# Altium PCB PCB-BATTERY-V1.0.PcbDoc
Units mm, origin at the board's own origin, x right, y up, seen from the top; angles counter-clockwise.
Board outline 75 x 30 mm, 2 copper layers (Top Layer, Bottom Layer); 20 components, 11 nets, 57 pads, 8 vias.
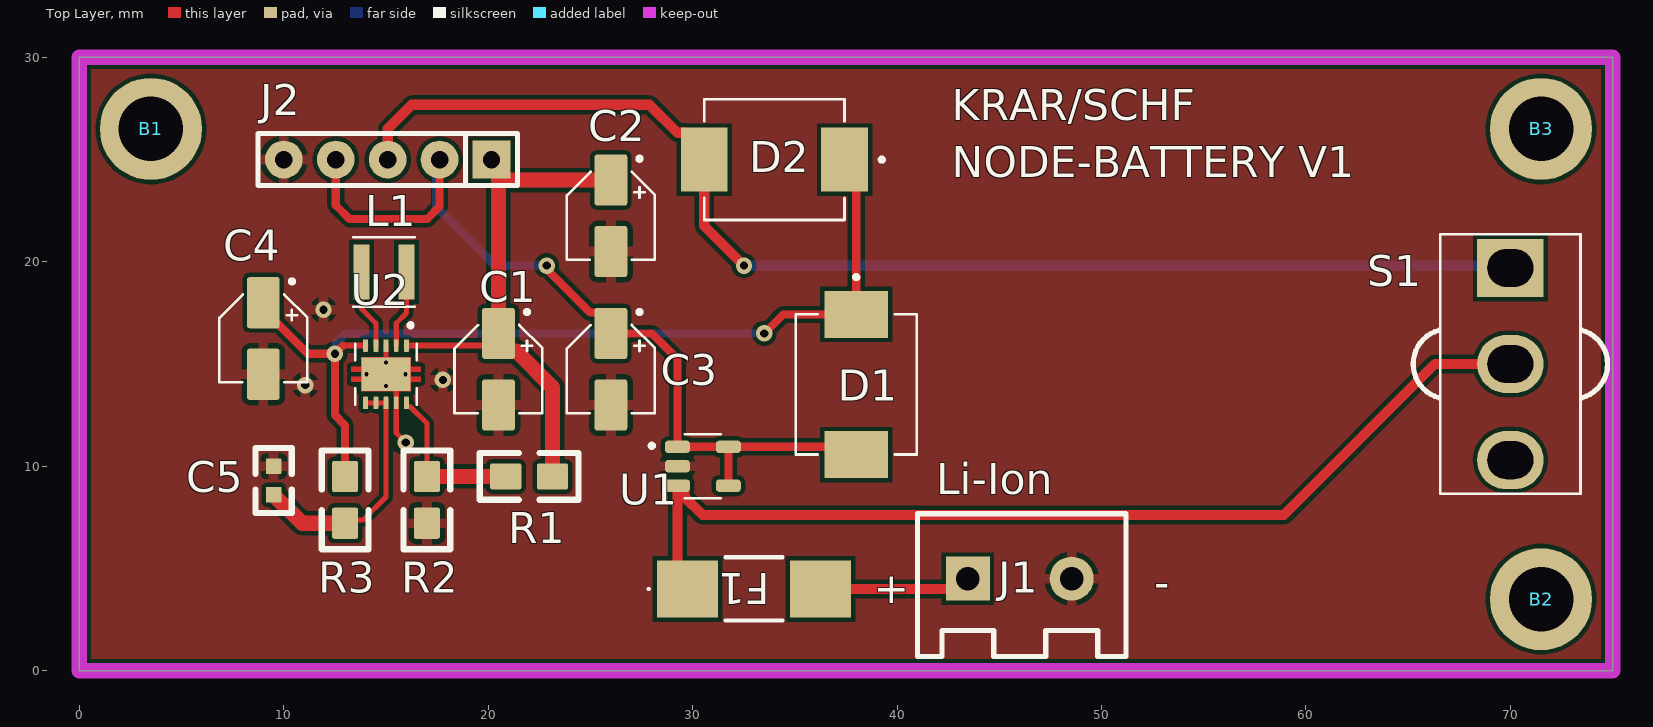
[diagram p0: Top Layer view]
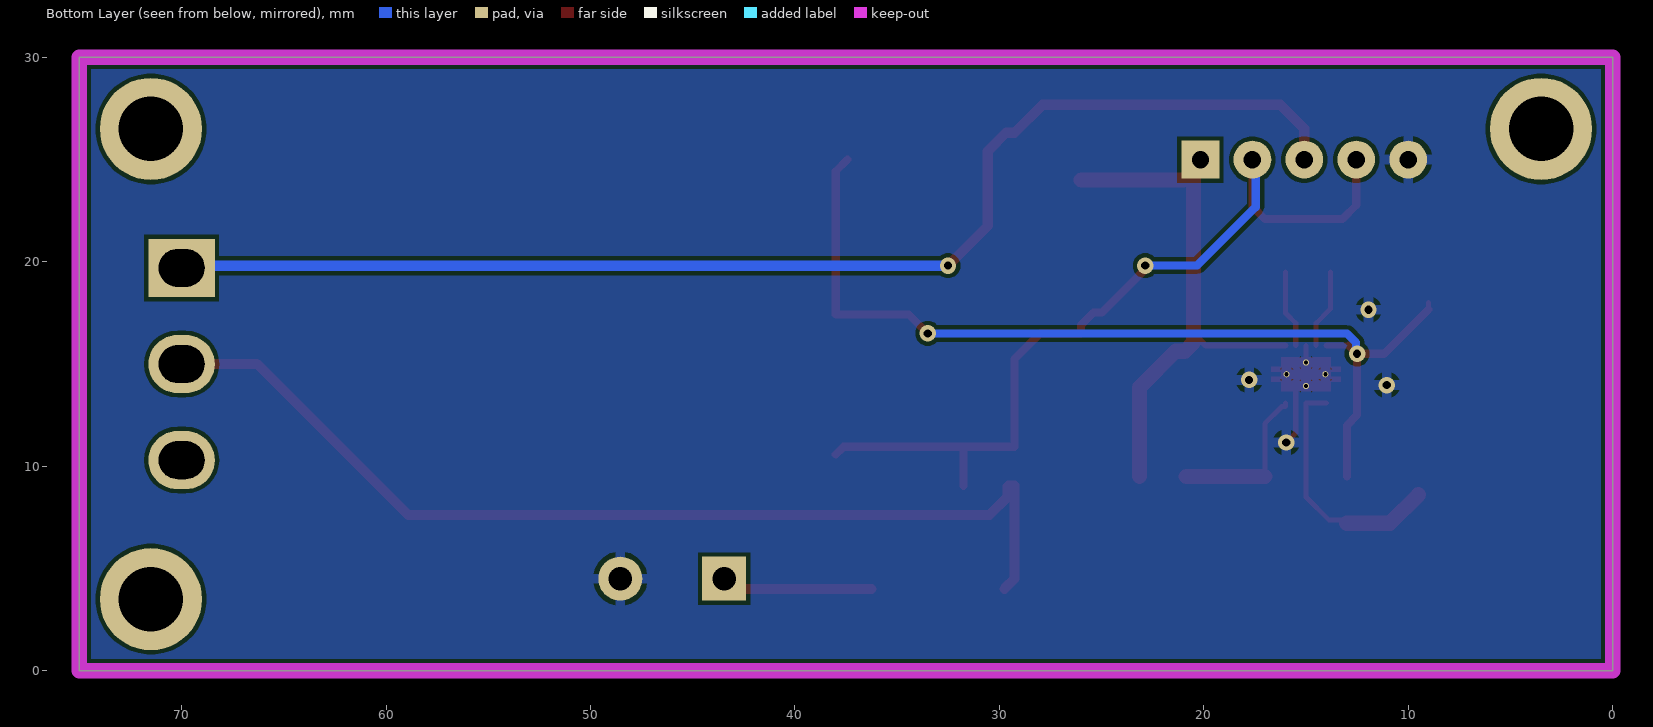
[diagram p1: Bottom Layer view, seen from below]

## Layer stack, top to bottom
Top Solder: solder mask 0.0102, Solder Resist, Dk 3.5
Top Layer: signal copper 0.0356
Dielectric 1: dielectric 0.32, FR-4, Dk 4.8
Bottom Layer: signal copper 0.0356
Bottom Solder: solder mask 0.0102, Solder Resist, Dk 3.5

## Board outline
0,0 0,30 75,30 75,0

## Design rules (kind name [scope] priority, off if disabled: settings)
Clearance [All] p1: gap=0.2 ignorepadtopadclearanceinfootprint=FALSE except(0.1: Arc-Arc Arc-Track Arc-SMDPad Arc-THPad Arc-Via Arc-Text Arc-Hole Track-Track Track-SMDPad Track-THPad Track-Via Track-Text Track-Hole SMDPad-SMDPad SMDPad-THPad SMDPad-Via SMDPad-Text SMDPad-Hole THPad-THPad THPad-Via THPad-Text THPad-Hole Via-Via Via-Text Via-Hole Text-Text Text-Hole)
HoleSize [All] p1: absolutevalues=TRUE maxlimit=6 minlimit=0.2 maxpercent=80.000 minpercent=20.000
MinimumSolderMaskSliver [All] p1: minsoldermaskwidth=0
PolygonConnect [All] p1: connectstyle=Relief reliefconductorwidth=0.5 reliefentries=4 polygonreliefangle="90 Angle" airgapwidth=0.25
RoutingVias [All] p1: holewidth=0.85 width=0.85 viastyle="Through Hole" minholewidth=1.75 minwidth=0.2 maxholewidth=1.95 maxwidth=0.95
SilkToSilkClearance [All] p1: silktosilkclearance=0
SilkToSolderMaskClearance [IsPad] p1: minsilkscreentomaskgap=0 clearancetoexposedcopper=TRUE
SolderMaskExpansion [All] p1: expansion=0.102 istentingtop=FALSE
Width [All] p1: maxlimit=6 minlimit=0.2 preferedwidth=0.75
26 further rules are at their usual default settings.

## Components (designator, comment, footprint, x,y, rotation, side; value= is the part's Value field where it differs from the comment)
B1 "Schraube" "B_Schraube-M3 PAD" 3.5,26.5 r0 top
B2 "Schraube" "B_Schraube-M3 PAD" 71.5,3.5 r0 top
B3 "Schraube" "B_Schraube-M3 PAD" 71.5,26.5 r0 top
C1 "10uF" C_SMD_B-Typ 20.5,14.75 r270 top
C2 "10uF" C_SMD_B-Typ 26,22.25 r270 top
C3 "1uF" C_SMD_B-Typ 26,14.75 r270 top
C4 "1uF" C_SMD_B-Typ 9,16.25 r270 top
C5 "100n" C_SMD_0603 9.5,9.302 r90 top
D1 "STPS340" D_DO-214 38,14 r270 top
D2 "STPS340" D_DO-214 34,25 r180 top
F1 "1A" F_OMF63_Schurtner 33,4 r0 top
J1 "Batterie | Lithium-Ion" "J_THT_Printklemme 2x" 46,4.5 r0 top
J2 "BAT_OUTPUT" SIP-5 15.08,25 r180 top
L1 "2,2uH - NR3015T2R2M" L_SMD_ND_NR3015T2R2M 14.9,19.5 r180 top
R1 "1M" R_SMD_0805 22,9.5 r0 top
R2 "200k" R_SMD_0805 17,8.357 r90 top
R3 "100" R_SMD_0805 13,8.357 r90 top
S1 "#Wert" S_THT_SW-3Pol 70,15 r0 top
U1 "U_MCP73811T-420I/OT" SOT95P280X145-5N 30.5,10 r0 top
U2 "U_TPS63000DRCRG4" VREG_V62/16624-01YE 15,14.5 r270 top

## Footprints (in the part's own frame and the unit in brackets; to place one, negate y for a bottom-side part, rotate by r counter-clockwise, add the part's x,y. Pads: shape width x height; smd on the part's side, far side on the other; paste and mask are expansions set on the pad)
"B_Schraube-M3 PAD" [mm] "LB-2024-04-18"
  round 5 hole 3.15 unplated: 1(0,0)
C_SMD_0603 [mil] "LB-2024-04-17"
  rrect10% 30x30 smd paste-0.79 mask+1.97: 1(-27.5,0) 2(27.5,0)
  silkscreen extent -62,-35 62,35
C_SMD_B-Typ [mm] "LB-2024-04-16"
  rrect15% 2.5x1.6 smd paste-0.02 mask+0.05: 1(-1.75,0) 2(1.75,0)
  silkscreen extent -2.89,-2.15 2.15,2.15
D_DO-214 [mm]
  rect 2.29x3.12 smd: 1(3.43,0) 2(-3.43,0)
  silkscreen extent -5.35,-2.95 3.43,2.95
F_OMF63_Schurtner [mm]
  rect 3x2.8 smd: 1(-3.25,0) 2(3.25,0)
  silkscreen extent -5.2,-1.55 1.4,1.55
"J_THT_Printklemme 2x" [mm] "LB-2024-04-17"
  rect 2.15x2.15 hole 1.15: 1(-2.54,0)
  round 2.15 hole 1.15: 2(2.54,0)
  silkscreen extent -5,-3.81 5.19,3.17
L_SMD_ND_NR3015T2R2M [mm]
  rect 0.8x2.7 smd: 1(-1.1,0) 2(1.1,0)
  silkscreen extent -1.5,-1.7 1.5,1.7, body extent -1.5,-1.5 1.5,1.5, height 1.5
R_SMD_0805 [mil] "LB-2024-04-17"
  rrect15% 60x50 smd paste-0.79 mask+1.97: 1(-45,0) 2(45,0)
  silkscreen extent -95,-45 95,45
S_THT_SW-3Pol [mm]
  rect 3.25x2.85 hole 1.85 slot 2.25 at 0 deg: 1(0,4.7)
  oval 3.25x2.85 hole 1.85 slot 2.25 at 0 deg: 2(0,0) 3(0,-4.7)
  silkscreen extent -4.76,-6.35 4.76,6.35
SIP-5 [mm] "LB-2024-04-17"
  rect 1.85x1.85 hole 0.85: 1(-5.08,0)
  round 1.85 hole 0.85: 2(-2.54,0) 3(0,0) 4(2.54,0) 5(5.08,0)
  silkscreen extent -6.35,-1.27 6.35,1.27
SOT95P280X145-5N [mm]
  rrect50% 1.22x0.6 smd: 1(-1.245,0.95) 2(-1.245,0) 3(-1.245,-0.95) 4(1.245,-0.95) 5(1.245,0.95)
  silkscreen extent -2.6,-1.57 0.88,1.57, body extent -1.45,-1.35 1.45,1.35, height 1.45
VREG_V62/16624-01YE [mm]
  rrect25% 0.6x0.24 smd mask+0: 1(-1.4,1) 2(-1.4,0.5) 3(-1.4,0) 4(-1.4,-0.5) 5(-1.4,-1) 6(1.4,-1) 7(1.4,-0.5) 8(1.4,0) 9(1.4,0.5) 10(1.4,1)
  round 0.3 hole 0.2 mask+0: 11(-0.575,0) 11(0,0.95) 11(0,-0.95) 11(0.575,0)
  rrect5% 1.65x2.4 smd paste-2 mask+0: 11(0,0)
  Top Layer region: 0.375,1.2 0.825,1.2 0.825,-1.2 0.375,-1.2 0.375,-1.7 0.125,-1.7 0.125,-1.2 -0.125,-1.2 -0.125,-1.7 -0.375,-1.7 -0.375,-1.2 -0.825,-1.2 -0.825,1.2 -0.375,1.2 -0.375,1.7 -0.125,1.7 -0.125,1.2 0.125,1.2 0.125,1.7 0.375,1.7
  silkscreen extent -2.49,-1.5 1.5,1.5, body extent -1.5,-1.5 1.5,1.5, height 1

## Part data
B1 B2 B3: library part B_Schraube, "Schraubenloch für M3 Schrauben"
C1 C2 C3 C4: library part C_SMD_ELK, "SMD Elektrolytkondensator"
C5: library part C_SMD_KO, "Kondensator SMD Universal, Keramik, Folie, usw."
D1 D2: library part D_SMD_Schottky, "Diode SMD Schottky", Spannung Rev.=0,4V
F1: library part F_THT_Fuse, "Sicherung"
J1: library part J_THT_CON2, "Stecker"
J2: library part J_THT_CON5, "Stecker"
L1: library part L_SMD_Spule, "Spule SMD"
R1 R2 R3: library part R_SMD_Widerstand, "Widerstand SMD"
S1: library part "S_THT_Schalter 3-Pol.", "Toggle Switch", Package=None, Availability=Unavailable, MP=100SP1T1B4M2QE, Price=None
U1: "Charger IC Lithium Ion/Polymer SOT-23-5", Package="SOT-23 Microchip", Availability="In Stock", Check_prices=https://www.snapeda.com/parts/MCP73811T-420I/OT/Microchip/view-part/?ref=eda, MF=Microchip, MP=MCP73811T-420I/OT, Price=None, Purchase-URL=https://pricing.snapeda.com/search/part/MCP73811T-420I/OT/?ref=eda, SnapEDA_Link=https://www.snapeda.com/parts/MCP73811T-420I/OT/Microchip/view-part/?ref=snap
U2: "High efficiency Buck-Boost Converter with 1.8A Current Switches in 3x3 QFN 10-VSON -40 to 85", Package="VSON-10 Texas Instruments", Availability=Warning, MF="Texas Instruments", MP=TPS63000DRCRG4, Price=None, Purchase-URL=https://pricing.snapeda.com/search/part/TPS63000DRCRG4/?ref=eda, SnapEDA_Link=https://www.snapeda.com/parts/TPS63000DRCRG4/Texas%20Instruments/view-part/287688/?ref=snap

## Via types
v1: diameter 0.8, hole 0.4, Top Layer to Bottom Layer, 8 vias

## Nets (pads, with @x,y where several pads share a name; then routed paths per layer and width w, separated by ;. In a path a pad name is that pad's centre, name@x,y a point inside that pad or via, vN(x,y) a via of type N, cw(c..) or ccw(c..) an arc to the next point about the centre after c; other vN are vias at no path point)
3,3V: C1.1 C2.1 J2.1 R1.2 U2.1 | length 26.8
  Top Layer w0.3: U2.1 19.9,15.9 C1.1
  Top Layer w0.75: J2.1@20,25 20.5,24.5 C1.1 20.5,16.05 20.925,15.625 21.375,15.625 23.143,13.857 R1.2 ; 21,24 C2.1
EN-MODUL: C3.1 D1.1 J2.2 J2.4 U1.1 U1.4 U1.5 | length 42.8
  Top Layer w0.4: J2.4 12.54,22.766 13.208,22.098 17.018,22.098 17.62,22.7 J2.2 ; v1(22.86,19.812) 22.86,19.64 24.986,17.514 25.4,17.514 26,16.914 C3.1 28,16.5 29.255,15.245 U1.1 U1.5 ; U1.4 U1.5 ; D1.1 37.62,10.95 U1.5
  Bottom Layer w0.4: J2.2@17.46,25 17.46,22.672 20.32,19.812 v1(22.86,19.812)
GND: C1.2 C2.2 C3.2 C4.2 C5.2 J1.2 J2.5 R2.1 U1.2 U2.3 U2.9 U2.11 | length 4.6
  Top Layer w0.25: U2.11@15,14.5 15.5,14 U2.9 15.5,11.622 v1(15.961,11.161) ; U2.11@15,15.075 U2.3
  other v1: 11.049,13.97 17.78,14.224 11.938,17.653
NetC4_1: C4.1 D1.2 D2.2 R3.2 U2.5 | length 47
  Top Layer w0.25: C4.1@9,17.675 C4.1
  Top Layer w0.3: 12.9,15.9 U2.5
  Top Layer w0.4: C4.1@9,17.675 11.175,15.5 v1(12.5,15.5) ; 12.9,15.9 v1(12.5,15.5) ; R3.2 13,12 12.5,12.5 v1(12.5,15.5) ; v1(33.5,16.5) 34.43,17.43 D1.2 38,24.43 D2.2
  Bottom Layer w0.4: v1(12.5,15.5) 12.557,15.557 12.557,16.057 13,16.5 v1(33.5,16.5)
NetC5_1: C5.1 R3.1 U2.6 U2.7 U2.8 | length 12.2
  Top Layer w0.25: R3.1 13.15,7.364 13.864,7.364 15,8.5 U2.8 U2.7 U2.6
  Top Layer w0.75: C5.1 10.889,7.214 R3.1
NetD2_1: D2.1 J2.3 S1.1 | length 62.4
  Top Layer w0.5: J2.3 15.08,26.51 16.256,27.686 27.884,27.686 29.26,26.31 29.675,26.31 30.57,25.415 D2.1 30.57,21.754 v1(32.512,19.812)
  Bottom Layer w0.5: v1(32.512,19.812) 69.888,19.812 S1.1
NetF1_2: F1.2 J1.1 | length 7.4
  Top Layer w0.5: F1.2 42.96,4 J1.1
NetL1_1: L1.1 U2.2 | length 3.8
  Top Layer w0.25: U2.2 15.5,17 16,17.5 L1.1
NetL1_2: L1.2 U2.4 | length 3.9
  Top Layer w0.25: L1.2 13.8,17.7 14.5,17 U2.4
NetR1_1: R1.1 R2.2 U2.10 | length 8
  Top Layer w0.25: U2.10 16,12.93 16.005,12.925 16.175,12.925 17,12.1 R2.2
  Top Layer w0.75: R2.2 R1.1
V_BAT: F1.1 S1.2 U1.3 | length 49.9
  Top Layer w0.5: F1.1 29.255,4.495 U1.3 29.544,9.05 29.594,9 29.594,8.506 30.48,7.62 58.928,7.62 66.308,15 S1.2
pads on no net: B1.1 B2.1 B3.1 S1.3

## Polygon pours and split planes (outlines as drawn)
GND on Top Layer "Bottom Layer-No Net" (solid, remove dead copper, pour order 0): -5.416,35.222 -5.416,-1.778 79.584,-1.778 78.584,-0.778 78.584,37.222 -3.416,37.222
GND on Bottom Layer "Bottom Layer-No Net" (solid, remove dead copper, pour order 1): -3.683,32.766 -5.207,34.29 -5.207,36.83 82.169,36.83 87.122,31.877 82.042,26.797 82.042,-3.81 -0.762,-3.81 -4.953,-8.001

## Keep-outs
Keep-Out Layer:
  the board outline again, w0.75

## Silkscreen, mask and mechanical layers (free items; w line width, h text height)
Top Overlay:
  text "KRAR/SCHF" at 42.672,26.924 h1.52
  text "NODE-BATTERY V1" at 42.672,24.13 h1.52
  text "Li-Ion" at 41.91,8.636 h1.52
  text "-" at 52.578,3.556 h1.52
  text "+" at 38.862,3.302 h1.52